# Altium PCB CORE_Prototype_1.PcbDoc
Units mil, origin at the board's own origin, x right, y up, seen from the top; angles counter-clockwise.
Board outline 659.02 x 782.03 mil, 2 copper layers (Top Layer, Bottom Layer); 16 components, 22 nets, 109 pads, 57 vias.
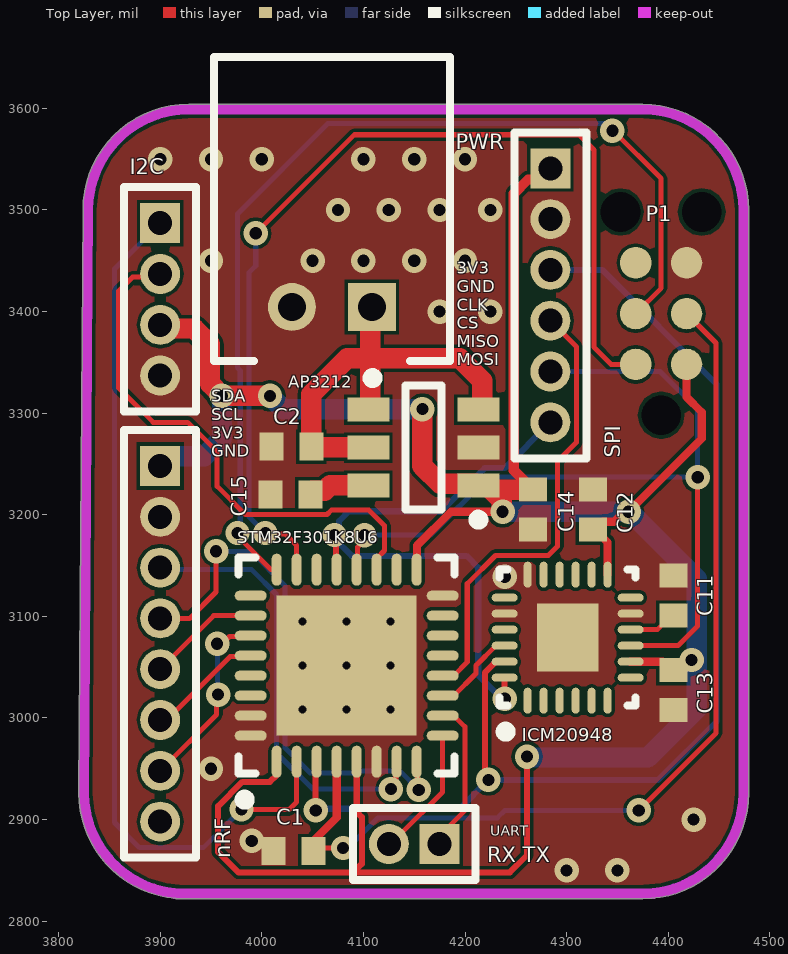
[diagram p0: Top Layer view]
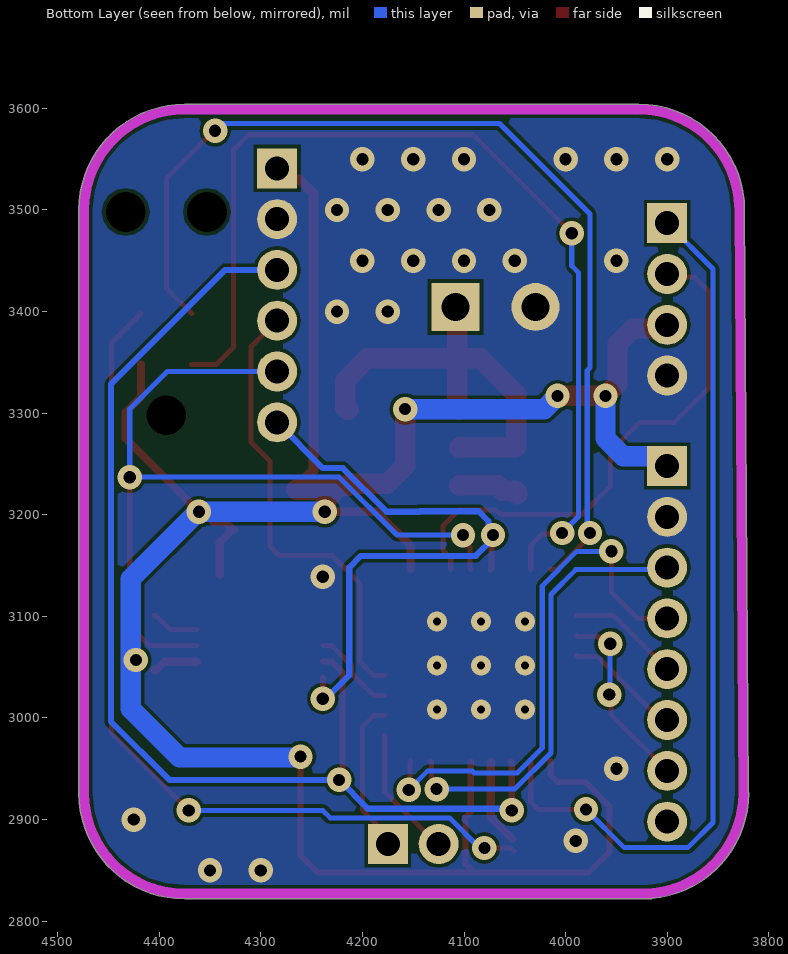
[diagram p1: Bottom Layer view, seen from below]
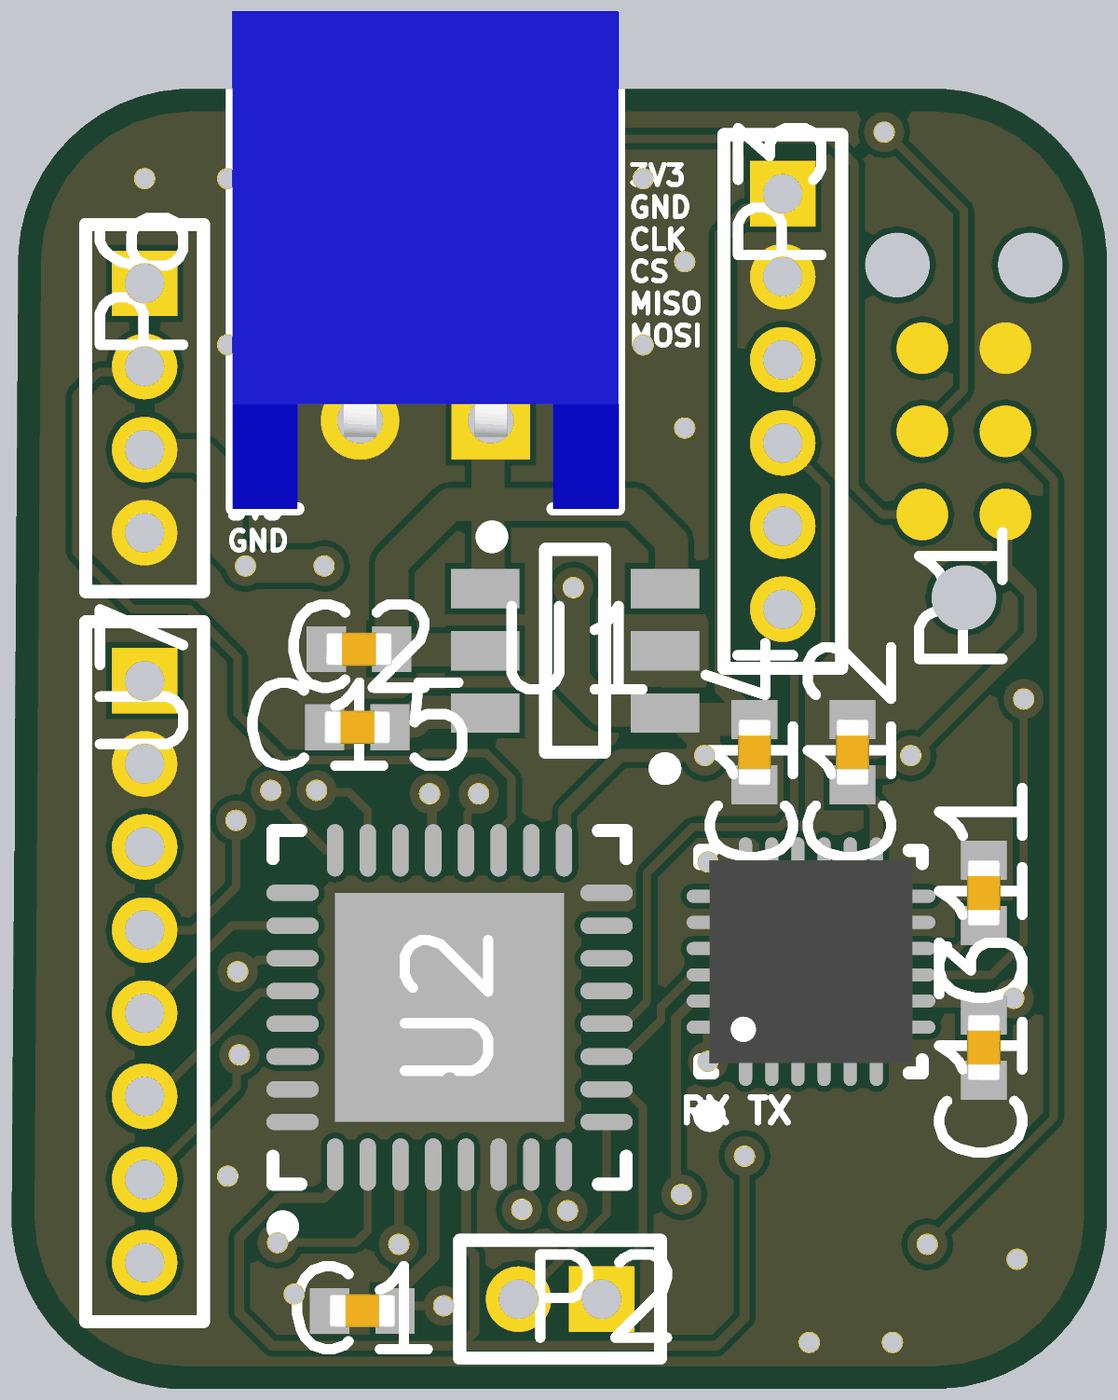
[diagram p2: 3D render of the assembled board from above, using the file's embedded part models]

## Layer stack, top to bottom
Top Solder: solder mask 0.4, Solder Resist, Dk 3.5
Top Layer: signal copper 1.4
Dielectric 1: dielectric 12.6, FR-4, Dk 4.8
Bottom Layer: signal copper 1.4
Bottom Solder: solder mask 0.4, Solder Resist, Dk 3.5

## Board outline
3819.99,2925.99 cw(c3825.01,2925.99) 3820.03,2926.65 3823.99,3500.02 cw(c3928,3500) 3928,3604.01 4375,3604.01 cw(c4375,3500) 4479.01,3500 4479.01,2925.9 cw(c4375.09,2925.9) 4375.09,2821.98 cw(c4375.09,2826.99) 4374.87,2821.99 3916.91,2821.98 cw(c3916.91,2827) 3914.97,2822.38 cw(c3924,2925.99)

## Design rules (kind name [scope] priority, off if disabled: settings)
Clearance [All] p1: gap=3.5 ignorepadtopadclearanceinfootprint=FALSE
PolygonConnect [All] p1: connectstyle=Direct reliefconductorwidth=10 reliefentries=4 polygonreliefangle="90 Angle" airgapwidth=10
RoutingVias [All] p1: holewidth=12 width=24 viastyle="Through Hole" minholewidth=12 minwidth=24 maxholewidth=28 maxwidth=50
SolderMaskExpansion [All] p1: expansion=0
Width [All] p1: maxlimit=250 minlimit=5 preferedwidth=5
30 further rules are at their usual default settings.

## Classes and differential pairs
component class U_MAIN_STM32L476RGT6: AP3212 C1 C2 C14 C15 I2C nRF P1 PWR SPI STM32F301K8U6 UART
component class U_ACC_ICM20948: C11 C12 C13 ICM20948

## Components (designator, comment, footprint, x,y, rotation, side; value= is the part's Value field where it differs from the comment)
AP3212 "AP7312-1833W6-7" SOT95P285X145-6N 4159,3266 r180 top (schematic designator U1)
C1 "Cap" CAPC1005N 4031,2869 r0 top value=0.1uF
C2 "Cap" CAPC1005N 4029,3267 r0 top value=1uF
C11 "Cap" CAPC1005N 4405,3120.32 r270 top value=0.1uF
C12 "Cap" CAPC1005N 4326,3205 r270 top value=0.1uF
C13 "Cap" CAPC1005N 4405,3027.31 r90 top value=0.1uF
C14 "Cap" CAPC1005N 4267,3205 r90 top value=1uF
C15 "Cap" CAPC1005N 4028,3220 r0 top value=1uF
I2C "MHDR1X4" MHDR1X4 3900,3487 r270 top (schematic designator P6)
ICM20948 "ICM-20948" TDK-QFN-24_L 4301,3079 r90 top (schematic designator U3)
nRF "nRF24L01" MHDR1X8 3900,3248 r270 top (schematic designator U7)
P1 "DNI" TC2030-NL 4393,3298 r90 top
PWR "S2B-PH-K-S(LF)(SN)" JST-S2B-PH-K-S_V 4069,3501 r180 top (schematic designator P4)
SPI "MHDR1X6" MHDR1X6 4284,3541 r270 top (schematic designator P3)
STM32F301K8U6 "STM32F301K8U6" STM-UFQFPN32_L 4083.53,3051.49 r90 top (schematic designator U2)
UART "Header 2" MHDR1X2 4175,2876 r180 top (schematic designator P2)

## Footprints (in the part's own frame and the unit in brackets; to place one, negate y for a bottom-side part, rotate by r counter-clockwise, add the part's x,y. Pads: shape width x height; smd on the part's side, far side on the other; paste and mask are expansions set on the pad)
CAPC1005N [mm] "Chip Capacitor (0402), Body 1.0x0.5mm, IPC Medium Density"
  rect 0.6x0.7 smd: 1(-0.5,0) 2(0.5,0)
  body extent -0.51,-0.26 0.51,0.26, height 0.61
JST-S2B-PH-K-S_V [mm] "THD, 2-Leads, Body 7.6x5.9mm, Pitch 2mm"
  rect 1.2x1.2 hole 0.7: 1(-1,2.45)
  round 1.2 hole 0.7: 2(1,2.45)
  silkscreen extent -2.95,-3.8 2.95,4.35, body extent -2.95,-3.8 2.95,3.8, height 4.8
MHDR1X2 [mm]
  rect 1x1 hole 0.6: 1(0,0)
  round 1 hole 0.6: 2(1.27,0)
  silkscreen extent -0.9,-0.9 2.17,0.9
MHDR1X4 [mm]
  rect 1x1 hole 0.6: 1(0,0)
  round 1 hole 0.6: 2(1.27,0) 3(2.54,0) 4(3.81,0)
  silkscreen extent -0.9,-0.9 4.71,0.9
MHDR1X6 [mm] "Connector; Header; 6 Position"
  rect 1x1 hole 0.6: 1(0,0)
  round 1 hole 0.6: 2(1.27,0) 3(2.54,0) 4(3.81,0) 5(5.08,0) 6(6.35,0)
  silkscreen extent -0.9,-0.9 7.25,0.9
MHDR1X8 [mm] "Connector; Header; 8 Position"
  rect 1x1 hole 0.6: 1(0,0)
  round 1 hole 0.6: 2(1.27,0) 3(2.54,0) 4(3.81,0) 5(5.08,0) 6(6.35,0) 7(7.62,0) 8(8.89,0)
  silkscreen extent -0.9,-0.9 9.79,0.9
SOT95P285X145-6N [mm] "SOT23, 6-Leads, Body 3.00x2.85mm, Pitch 0.95mm, IPC Medium Density"
  rect 1.05x0.6 smd: 1(-1.375,0.95) 2(-1.375,0) 3(-1.375,-0.95) 4(1.375,-0.95) 5(1.375,0) 6(1.375,0.95)
  silkscreen extent -1.5,-1.55 0.45,1.92, body extent -0.85,-1.55 0.85,1.55, height 1.45
STM-UFQFPN32_L [mm] "QFN, 32-Leads, Body 5.1x5.1mm, Pitch 0.5mm, Thermal Pad 3.5x3.5mm, IPC High Density"
  oval 0.8x0.25 smd: 1(-2.4,1.75) 2(-2.4,1.25) 3(-2.4,0.75) 4(-2.4,0.25) 5(-2.4,-0.25) 6(-2.4,-0.75) 7(-2.4,-1.25) 8(-2.4,-1.75) 17(2.4,-1.75) 18(2.4,-1.25) 19(2.4,-0.75) 20(2.4,-0.25) 21(2.4,0.25) 22(2.4,0.75) 23(2.4,1.25) 24(2.4,1.75)
  oval 0.25x0.8 smd: 9(-1.75,-2.4) 10(-1.25,-2.4) 11(-0.75,-2.4) 12(-0.25,-2.4) 13(0.25,-2.4) 14(0.75,-2.4) 15(1.25,-2.4) 16(1.75,-2.4) 25(1.75,2.4) 26(1.25,2.4) 27(0.75,2.4) 28(0.25,2.4) 29(-0.25,2.4) 30(-0.75,2.4) 31(-1.25,2.4) 32(-1.75,2.4)
  rect 3.5x3.5 smd: 33(0,0)
  silkscreen extent -3.47,-2.7 2.7,2.7, body extent -2.55,-2.55 2.55,2.55, height 0.6
TC2030-NL [mil]
  round 31 smd paste-100: 1(50,-25) 2(50,25) 3(100,-25) 4(100,25) 5(150,-25) 6(150,25)
  round 0 hole 39 unplated paste+0: MH(0,0) MH(200,-40) MH(200,40)
TDK-QFN-24_L [mm] "QFN, 24-Leads, Body 3.10x3.10mm, Pitch 0.40mm, Thermal Pad 1.70x1.54mm, IPC High Density"
  oval 0.65x0.2 smd: 1(-1.575,1) 2(-1.575,0.6) 3(-1.575,0.2) 4(-1.575,-0.2) 5(-1.575,-0.6) 6(-1.575,-1) 13(1.575,-1) 14(1.575,-0.6) 15(1.575,-0.2) 16(1.575,0.2) 17(1.575,0.6) 18(1.575,1)
  oval 0.2x0.65 smd: 7(-1,-1.575) 8(-0.6,-1.575) 9(-0.2,-1.575) 10(0.2,-1.575) 11(0.6,-1.575) 12(1,-1.575) 19(1,1.575) 20(0.6,1.575) 21(0.2,1.575) 22(-0.2,1.575) 23(-0.6,1.575) 24(-1,1.575)
  rect 1.7x1.54 smd: 25(0,0)
  silkscreen extent -2.47,-1.7 1.7,1.7, body extent -1.55,-1.55 1.55,1.55, height 1.05

## Part data
AP3212: "IC REG LINEAR 1.8V/3.3V SOT26", Case/Package=SOT-26, Current - Output 1=150mA, Dropout Voltage=150mV, Manufacturer 1=Diodes, Max Input Voltage=6V, Max Operating Temperature=85°C, Max Power Dissipation=950mW, Min Current Limit=200mA, Min Input Voltage=2V, Min Operating Temperature=-40°C, Operating Supply Current=60uA, Output Voltage=3.3V, Output Voltage Accuracy=2%, Package Quantity=3000, Power Supply Rejection Ratio (PSRR)=65dB, Quiescent Current=80uA, Reference Voltage=800mV, Supplier Part Number 1=AP7312-1833W6-7DICT-ND, Voltage - Output 1=1.8V, Accuracy=2%, ComponentLink1Description=https://datasheet.ciiva.com/30477/0900766b8115c2c0-30477178.pdf?src-supplier=RSComponents, ComponentLink1URL=https://datasheet.ciiva.com/30477/0900766b8115c2c0-30477178.pdf?src-supplier=RSComponents, ComponentLink2Description=https://datasheet.ciiva.com/8078/1636610-8078247.pdf?src-supplier=Element14, ComponentLink2URL=https://datasheet.ciiva.com/8078/1636610-8078247.pdf?src-supplier=Element14, ComponentLink3Description=https://datasheet.ciiva.com/8239/ap7312-8239997.pdf?src-supplier=Avnet, ComponentLink3URL=https://datasheet.ciiva.com/8239/ap7312-8239997.pdf?src-supplier=Avnet, Contact Plating=Tin,Matte, Current - Output 2=150mA, Height=1.3mm, Lead Free="Lead Free", Length=3.1mm, Manufacturer Part Number 1=AP7312-1833W6-7, Max Output Current=150mA, Mount="Surface Mount", Number of Outputs=2, Number of Pins=6, Number of Regulators=2, Output Current=150mA, Output Type=Fixed, Packaging="Tape and Reel", Polarity=Positive, Power Dissipation=950mW, Power Rating=950mW, Pricing 1="1=0.59000, 10=0.52100, 100=0.37100, 500=0.29994, 1000=0.22890 (USD)", Radiation Hardening=No, REACH SVHC="No SVHC", RoHS=Yes, Stock 1=17585, Supplier 1=Digi-Key, Voltage - Output 2=3.3V, Width=1.7mm
C1 C2 C11 C12 C13 C14 C15: "Capacitor", LatestRevisionDate=17-Jul-2002, LatestRevisionNote="Re-released for DXP Platform.", PackageDescription="Radial Cap, Thru-Hole; 2 Leads; 0.3 in Pin Spacing", PackageReference=RAD-0.3, Published=8-Jun-2000, Publisher="Altium Limited"
I2C: "Header, 4-Pin", LatestRevisionDate=17-Jul-2002, LatestRevisionNote="Re-released for DXP Platform.", Publisher="Altium Limited"
ICM20948: library part CMP-2000-07532-1, "World’s Lowest Power 9-Axis MEMS MotionTracking(TM) Device, 1.71 to 3.6 V, -40 to 85 degC, 24-Pin QFN, RoHS, Tape and Reel", Manufacturer=TDK, Package Description="24-Pin Quad Flat No-lead Package, Body 3 x 3 mm, Pitch 0.4 mm", Package Reference=QFN-24, Datasheet URL=https://www.invensense.com/wp-content/uploads/2016/06/DS-000189-ICM-20948-v1.3.pdf, Datasheet Version="Rev. 1.3, 06/2017", Manufacturer URL=http://www.tdk.com/, Mounting Technology=SurfaceMount
P1: library part TC2030-CTX
PWR: library part CMP-1755-00004-1, "Male Header, Pitch 2 mm, 1 x 2 Position, Height 4.8 mm, Tail Length 3.4 mm, -25 to 85 degC, RoHS, Bulk", Capacitance="10 uF", Case\Package=Radial, Max Operating Temperature="85 degC", Min Operating Temperature="-40 degC", Package Quantity=200, Tolerance=20%, Voltage Rating="50 V", ComponentLink1Description=Datasheet, ComponentLink1URL=http://www.jst-mfg.com/product/pdf/eng/ePH.pdf, DatasheetVersion=Dec-12, Diameter="5 mm", Height="11 mm", Lead Pitch="2 mm", Length="11 mm", Mount="Through Hole", PackageDescription="Male Header, Pitch 2 mm, 1 x 2 Position, Height 4.8 mm, Tail Length 3.4 mm", PackageReference=S2B-PH-K-S, Packaging=Bulk, Pins=2, Radiation Hardening=No, REACH SVHC="No SVHC", RoHSCompliant=true, Voltage Rating (DC)="50 V"
SPI: "Header, 6-Pin", LatestRevisionDate=17-Jul-2002, LatestRevisionNote="Re-released for DXP Platform.", Publisher="Altium Limited"
STM32F301K8U6: library part CMP-0537-00006-1, "ARM Cortex-M4 32-bit MCU, 64 KB Flash, 16 KB Internal RAM, 24 I/Os, 32-Pin UFQFPN, -40 to 85 degC, Tray", I/Os (High Current)=24, Operating Frequency(F) (Processor speed) (MHz)=72, Package Description="32-Pin Ultra Thin Fine Pitch Quad Flat No-Lead, 5 x 5 x 0.6 mm Body, 0.5 mm Pitch, Exposed Pad 3.5 x 3.5 mm", Package Reference=UFQFPN32, Supply Voltage(Vcc) min (V)=2, ComponentLink1Description="Manufacturer URL", ComponentLink1URL=http://www.st.com/, ComponentLink2Description=Datasheet, ComponentLink2URL=http://www.st.com/st-web-ui/static/active/en/resource/technical/document/datasheet/DM00093332.pdf, Core="ARM Cortex-M4", D/A Converter=1, DatasheetVersion="Rev. 6", FLASH Size (Prog) (kB)=64, Internal RAM Size (kB)=16, Mounting Technology="Surface Mount", Packing=Tray
UART: "Header, 2-Pin", LatestRevisionDate=17-Jul-2002, LatestRevisionNote="Re-released for DXP Platform.", Publisher="Altium Limited"

## Via types
v1: diameter 24, hole 12, Top Layer to Bottom Layer, tented both sides, 48 vias
v2: diameter 19.68, hole 7.87, Top Layer to Bottom Layer, 9 vias

## Nets (pads, with @x,y where several pads share a name; then routed paths per layer and width w, separated by ;. In a path a pad name is that pad's centre, name@x,y a point inside that pad or via, vN(x,y) a via of type N, cw(c..) or ccw(c..) an arc to the next point about the centre after c; other vN are vias at no path point)
1V8D: AP3212.6 C15.2 | length 62.2
  Top Layer w20: C15.2 4047.69,3221.97 4049.5,3223.78 4061.78,3223.78 4067,3229 4104.46,3229 AP3212.6
3V3: AP3212.1 C12.2 C13.2 C14.2 I2C.3 ICM20948.8 ICM20948.13 nRF.1 P1.1 SPI.1 STM32F301K8U6.1 STM32F301K8U6.5 STM32F301K8U6.17 | length 2618.4
  Top Layer w6: STM32F301K8U6.1 4014.63,2943.63 4008,2937 3980.84,2937 3957,2913.16 3957,2868 3977,2848 4090,2848 ; STM32F301K8U6.5 4093.37,2907.62 4098.5,2902.49 4098.5,2856.5 4090,2848 ; v1(4261,2962) 4261,2864.78 4244.22,2848 4090,2848
  Top Layer w8: STM32F301K8U6.17 4152.78,3146.33 4152.78,3169.78 4186,3203 4235.47,3203 v1@4236.23,3203.77 ; C12.2 C12.2@4327.97,3185.31 ; ICM20948.13 4340.37,3172.91 C12.2@4327.97,3185.31 ; ICM20948.8 4394.65,3055.38 4403.03,3047 C13.2 ; C13.2@4416,3058 4417,3057 v1(4423,3057) ; P1.1 4418,3315.89 4433,3300.89 4433,3275 v1(4361,3203) 4356.67,3203 4346.8,3193.13 4335.78,3193.13 C12.2@4327.97,3185.31
  Top Layer w10: C14.2 4265.03,3224.69 4258.22,3231.5 4258.22,3233.46 4248,3243.69 4248,3516 4262,3530 4273,3530 SPI.1
  Top Layer w20: I2C.3 3903.71,3383.29 3933.71,3383.29 3949,3368 3949,3328.72 v1(3960.72,3317) v1(4008,3317) ; v1(4158,3304) 4158,3248 4175.59,3230.41 4211.32,3230.41 AP3212.1 4221.99,3228.6 AP3212.1@4225.91,3224.69 ; v1@4236.23,3203.77 4236.23,3214.36 AP3212.1@4225.91,3224.69 ; C14.2@4265.03,3224.69 AP3212.1@4225.91,3224.69
  Bottom Layer w6: v1(4261,2962) v1@4262,2963
  Bottom Layer w8: v1(4423,3057) 4423,3056 v1@4425,3054
  Bottom Layer w20: nRF.1 3909.69,3257.69 3943.4,3257.69 3960.72,3275 v1(3960.72,3317) ; v1(4008,3317) 4021,3304 v1(4158,3304) ; v1(4237,3203) v1(4361,3203) 4362.08,3203 4428,3137.08 4428,3009 4380,2961 v1@4262,2961
GND: AP3212.2 C1.1 C2.1 C11.1 C12.1 C13.1 C14.1 C15.1 I2C.4 ICM20948.11 ICM20948.18 ICM20948.20 ICM20948.25 nRF.2 P1.5 PWR.2 SPI.2 STM32F301K8U6.6 STM32F301K8U6.16 STM32F301K8U6.31 STM32F301K8U6.32 STM32F301K8U6.33
  other v1: 4300,2850 4350,2850 3990,2879 4425,2900 3950,2950 4239,3139 4175,3400 4225,3400 3950,3450 4050,3450 4100,3450 4150,3450 4200,3450 4075,3500 4125,3500 4175,3500 4225,3500 3900,3550 3950,3550 4000,3550 4100,3550 4150,3550 4200,3550
  other v2: 4040.22,3008.18 4083.53,3008.18 4126.83,3008.18 4040.22,3051.49 4083.53,3051.49 4126.83,3051.49 4040.22,3094.8 4083.53,3094.8 4126.83,3094.8
I2C_SCL_4: I2C.2 STM32F301K8U6.19 | length 530.9
  Top Layer w5: I2C.2 3896.81,3433.81 3872.81,3433.81 3859,3420 3859,3325 3893,3291 3927,3291 3956,3262 3956,3228 3983.78,3200.22 4064.1,3200.22 4068.38,3204.5 4105.5,3204.5 4120.69,3189.31 4120.69,3164.93 4113.06,3157.3 STM32F301K8U6.19
I2C_SDA_4: I2C.1 STM32F301K8U6.2 | length 856.5
  Top Layer w5: v1(3980,2910) 4027,2910 4034.32,2917.32 STM32F301K8U6.2
  Bottom Layer w5: I2C.1 3855,3442 3855,2897 3879.69,2872.31 3942.31,2872.31 v1(3980,2910)
nRF_CE_4: nRF.3 STM32F301K8U6.7 | length 438.1
  Top Layer w5: v1(4127,2930) 4127,2935.14 4131.81,2939.96 4131.81,2956.07 STM32F301K8U6.7
  Bottom Layer w5: nRF.3 3902,3146 3990,3146 4014.5,3121.5 4014.5,2965.5 4050,2930 v1(4127,2930)
nRF_CLK_4: nRF.5 STM32F301K8U6.26 | length 110.9
  Top Layer w5: nRF.5 3952.7,3100.7 STM32F301K8U6.26
nRF_CS_4: nRF.4 STM32F301K8U6.8 | length 526.4
  Top Layer w5: nRF.4 3929,3098 3955,3124 v1(3955,3164) ; STM32F301K8U6.8 4153.35,2956.07 4153.35,2930.33 v1(4154.5,2929.18)
  Bottom Layer w5: v1(3955,3164) 3989,3164 4023,3130 4023,2970.37 4047.37,2946 4089.91,2946 4091.91,2948 4135.68,2948 v1(4154.5,2929.18)
nRF_MISO_4: nRF.7 STM32F301K8U6.27 | length 185.4
  Top Layer w5: nRF.7 3955.5,3003.5 3955.5,3021.5 v1(3957,3023) ; v1(3956,3073) 3961.14,3073 3968.23,3080.09 3988.11,3080.09 STM32F301K8U6.27
  Bottom Layer w5: v1(3956,3073) 3956.5,3072.5 3956.5,3023.5 v1(3957,3023)
nRF_MOSI_4: nRF.6 STM32F301K8U6.28 | length 115.3
  Top Layer w5: nRF.6 3906.46,2998 3968.86,3060.4 3988.11,3060.4 STM32F301K8U6.28
REGOUT_2: C11.2 ICM20948.10 | length 47.7
  Top Layer w5: ICM20948.10 4389.28,3086.87 4403.03,3100.63 C11.2
RESET_4: C1.2 P1.3 STM32F301K8U6.4 | length 954.1
  Top Layer w5: C1.2 4053.69,2872 v1(4080,2872) ; v1(4371,2909) 4447,2985 4447,3369 P1.3
  Top Layer w8: C1.2@4052.58,2881 4073.69,2902.11 STM32F301K8U6.4
  Bottom Layer w5: v1(4080,2872) 4084.68,2872 4114.36,2901.69 4231.69,2901.69 4239,2909 v1(4371,2909)
SPI_CLK: ICM20948.23 SPI.3 STM32F301K8U6.3 | length 1152.2
  Top Layer w6: v1(4053,2909) 4053,2956 STM32F301K8U6.3 ; v1(4223,2939) 4219.7,2942.3 4219.7,3044.94 4230.13,3055.38 ICM20948.23
  Bottom Layer w6: v1(4053,2909) 4054.69,2910.69 4194.69,2910.69 v1(4223,2939) 4390,2939 4447.5,2996.5 4447.5,3328.5 4335,3441 SPI.3
SPI_CS1: ICM20948.22 STM32F301K8U6.11 | length 86
  Top Layer w5: STM32F301K8U6.11 4188.84,3021.96 4210.7,3043.81 4210.7,3051.69 4230.13,3071.13 ICM20948.22
SPI_CS2_4: SPI.4 STM32F301K8U6.12 | length 451.3
  Top Layer w5: STM32F301K8U6.12 4188.84,3041.65 4202.2,3055 4202.2,3132.2 4230,3160 4282,3160 4291,3169 4291,3252.66 4309.69,3271.35 4309.69,3365.31 SPI.4
SPI_MISO: ICM20948.9 SPI.5 STM32F301K8U6.20 | length 839.4
  Top Layer w5: STM32F301K8U6.20 4094.3,3146.9 4094.3,3168.16 4101,3174.86 v1(4101,3180) ; ICM20948.9 4409.57,3071.13 4429,3090.55 v1(4429,3237)
  Bottom Layer w5: v1@4103,3178 v1(4101,3180) 4166,3180 4223,3237 v1(4429,3237) 4429,3304 4392,3341 SPI.5
SPI_MOSI: ICM20948.24 SPI.6 STM32F301K8U6.21 | length 618.3
  Top Layer w6: v1(4071.5,3180.04) 4072.95,3178.59 4072.95,3146.71 STM32F301K8U6.21 ; v1(4239,3019) ICM20948.24
  Bottom Layer w6: v1(4239,3019) 4236,3019 4213,3042 4213,3148 4201.5,3159.5 4088.5,3159.5 4071.5,3176.5 v1(4071.5,3180.04) 4071.5,3184.91 4076,3189.41 4076,3193.87 4085.63,3203.5 4143.42,3203.5 4143.92,3203 4176.27,3203 4219.27,3246 4239,3246 SPI.6
SWCLK_4: P1.4 STM32F301K8U6.24 | length 991.1
  Top Layer w5: v1(3976,3182) 3979.64,3178.36 3979.64,3175.36 4009.02,3145.98 STM32F301K8U6.24 ; v1(4345,3578) 4345.99,3578 4393,3530.99 4393,3423 P1.4
  Bottom Layer w5: v1(3976,3182) 3978.72,3184.72 3978.72,3342.03 3976,3344.75 3976,3496 4065,3585 4338,3585 v1(4345,3578)
SWDIO_4: P1.2 STM32F301K8U6.23 | length 985.6
  Top Layer w5: v1(3994,3477) 4091,3574 4312,3574 4327,3559 4327,3364.93 4343.93,3348 P1.2 ; v1(4003.5,3182.04) 4004.54,3181 4023,3181 4034.32,3169.68 STM32F301K8U6.23
  Bottom Layer w5: v1(3994,3477) 3994,3445 3987.22,3438.22 3987.22,3198.33 v1(4003.5,3182.04)
UART_RX_4: STM32F301K8U6.10 UART.1 | length 142.5
  Top Layer w5: UART.1@4176,2885 4199.76,2908.76 4199.76,2991.35 4188.84,3002.28 STM32F301K8U6.10
UART_TX_4: STM32F301K8U6.9 UART.2 | length 142.1
  Top Layer w5: UART.2 4128,2873 UART.2@4128,2860 ; UART.2@4126,2885 4135.77,2885 4178.02,2927.25 STM32F301K8U6.9
VBAT_4: AP3212.3 AP3212.4 AP3212.5 C2.2 PWR.1 | length 434.3
  Top Layer w20: AP3212.5 4104.37,3266.5 4049.19,3266.5 C2.2 4048.69,3318.69 4083.97,3353.97 4106.62,3353.97 ; AP3212.4 4106.62,3305.15 4106.62,3353.97 ; PWR.1 4106.62,3402.79 4106.62,3353.97 ; AP3212.3 4215.19,3303.4 4217,3305.21 4217,3332 4195.03,3353.97 4106.62,3353.97
pads on no net: ICM20948.1 ICM20948.2 ICM20948.3 ICM20948.4 ICM20948.5 ICM20948.6 ICM20948.7 ICM20948.12 ICM20948.14 ICM20948.15 ICM20948.16 ICM20948.17 ICM20948.19 ICM20948.21 nRF.8 P1.6 P1.MH STM32F301K8U6.13 STM32F301K8U6.14 STM32F301K8U6.15 STM32F301K8U6.18 STM32F301K8U6.22 STM32F301K8U6.25 STM32F301K8U6.29 STM32F301K8U6.30

## Polygon pours and split planes (outlines as drawn)
GND on Top Layer "Top Layer-GND" (solid, remove dead copper, pour order 32): 3817,3607 4489,3607 4487,3605 4487,2807 3815,2807 3816,2808 3816,3608
GND on Top Layer "Top Layer-GND 2" (solid, pour order 30): 4420,3661
GND on Top Layer "Top Layer-GND 1" (solid, pour order 18): 2665,3625
GND on Bottom Layer "Bottom Layer-GND" (solid, remove dead copper, pour order 28): 3810,3616 3813,3613 4492,3613 4492,2821 4504,2809 3811,2809 3811,3614
GND on Bottom Layer "Bottom Layer-GND 2" (solid, pour order 24): 3490,3478
GND on Bottom Layer "Bottom Layer-GND 1" (solid, pour order 10): 3085,3995

## Keep-outs
Keep-Out Layer:
  region: 5385,3405
  region: 5425,3500
  lines w10: 3825.01,2925.99 ccw(c3924,2925.99) 3924,2827 ; 3825.04,2925.99 3829.01,3500 cw(c3928,3500) 3928,3598.99 4375,3598.99 cw(c4375,3500) 4474,3500 4474,2925.9 cw(c4375.09,2925.9) 4375.09,2827 3916.91,2827

## Silkscreen, mask and mechanical layers (free items; w line width, h text height)
Top Overlay:
  text "3V3 / GND / CLK / CS / MISO / MOSI" at 4192,3347 h12
  text "SDA / SCL / 3V3 / GND" at 3950,3257 h12
  text "RX TX" at 4222,2858 h15